# Altium PCB graphics_tester.PcbDoc
Units mm, origin at the board's own origin, x right, y up, seen from the top; angles counter-clockwise.
Board outline 99 x 99 mm, 2 copper layers (Top Layer, Bottom Layer); 2 components, 0 nets, 8 pads, 1 vias.
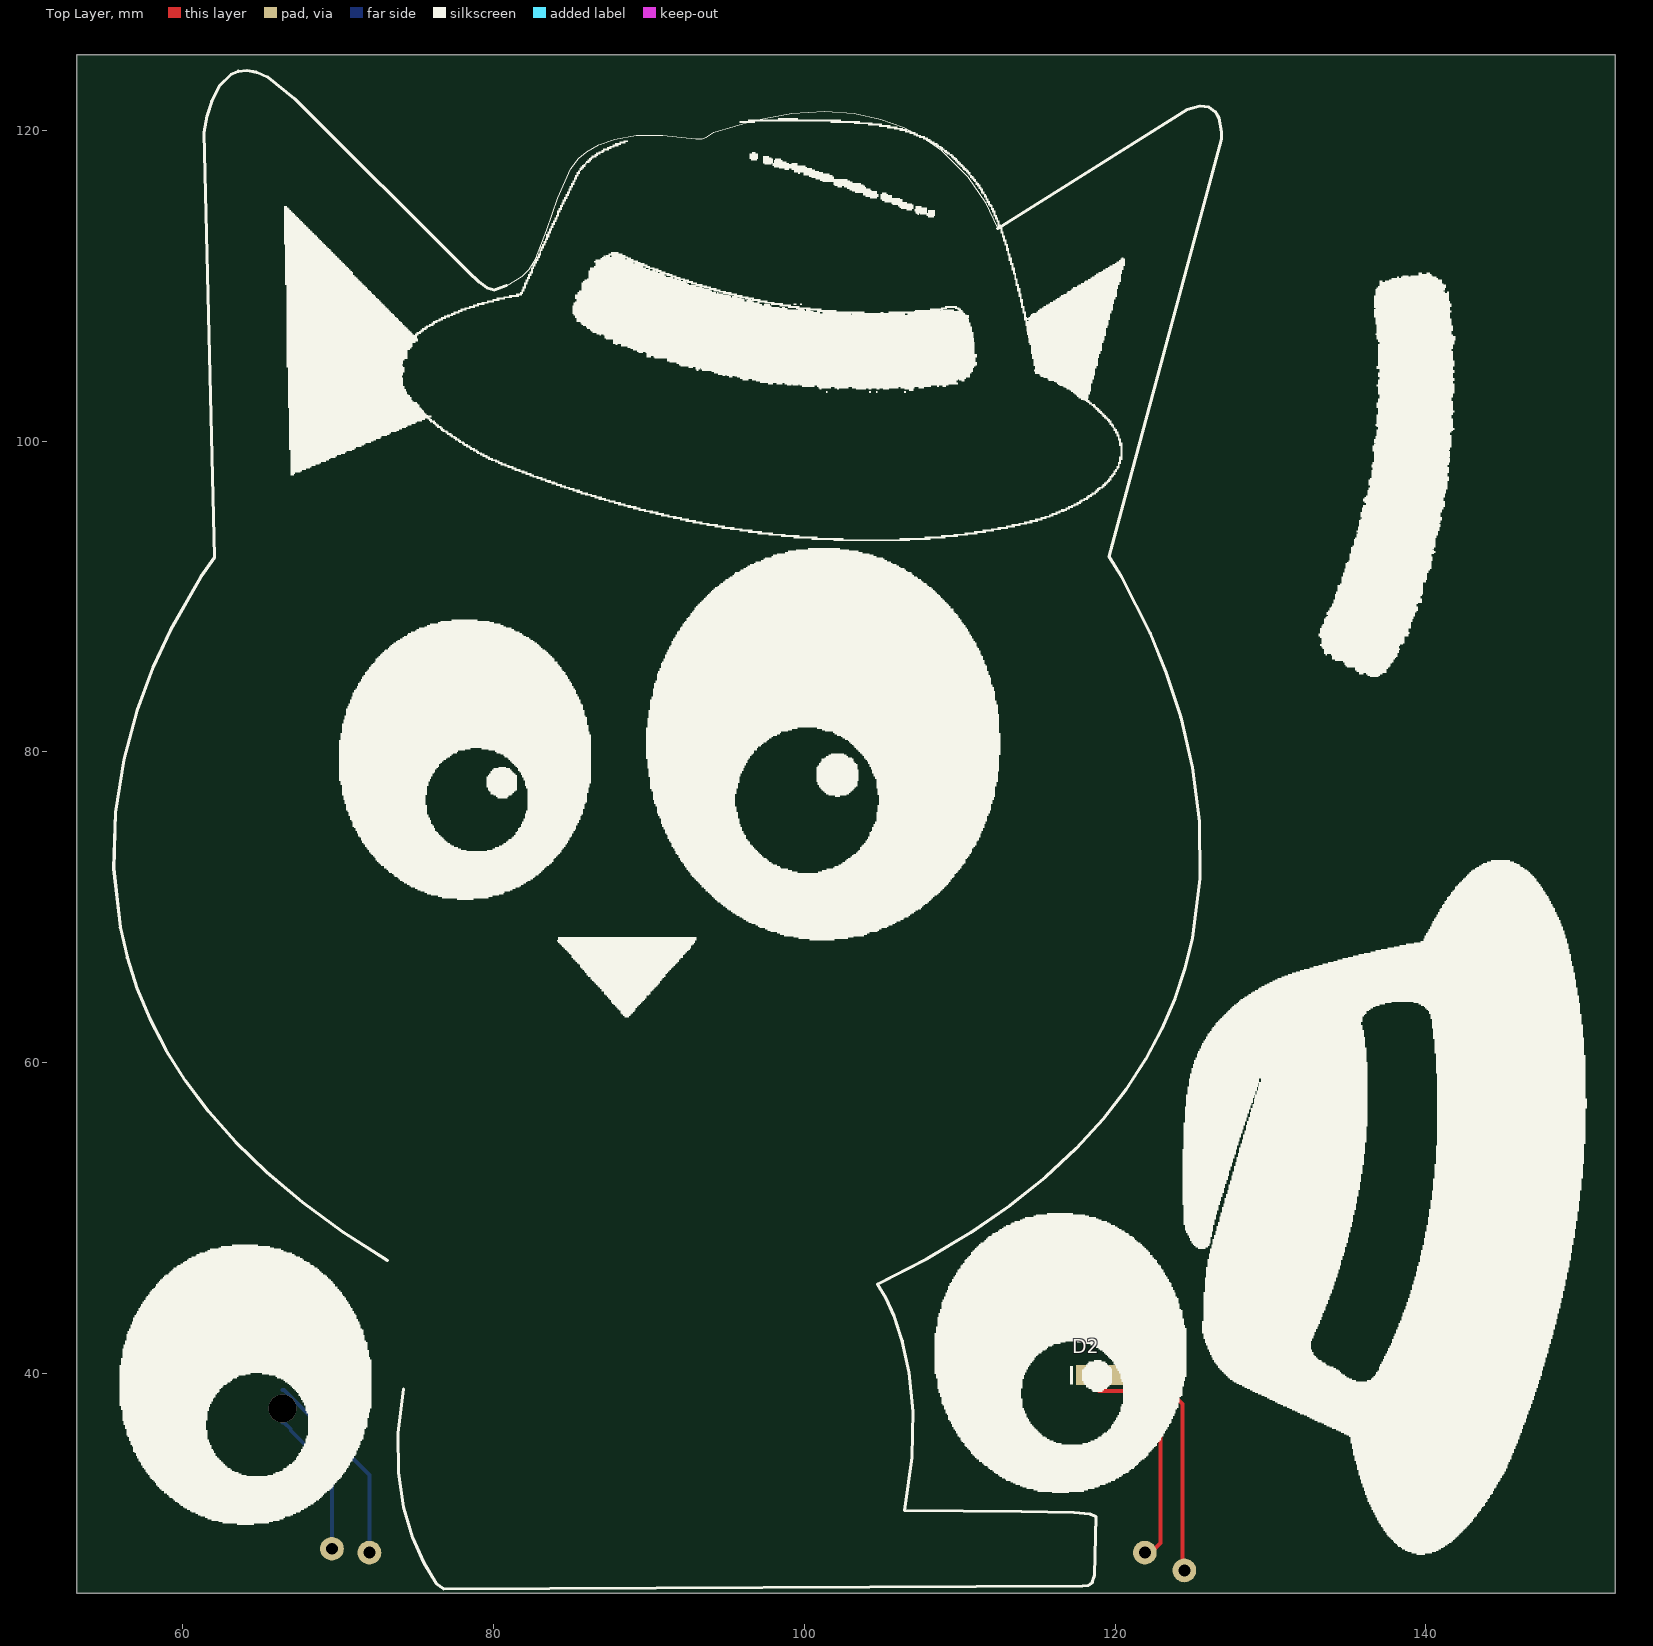
[diagram p0: Top Layer view]
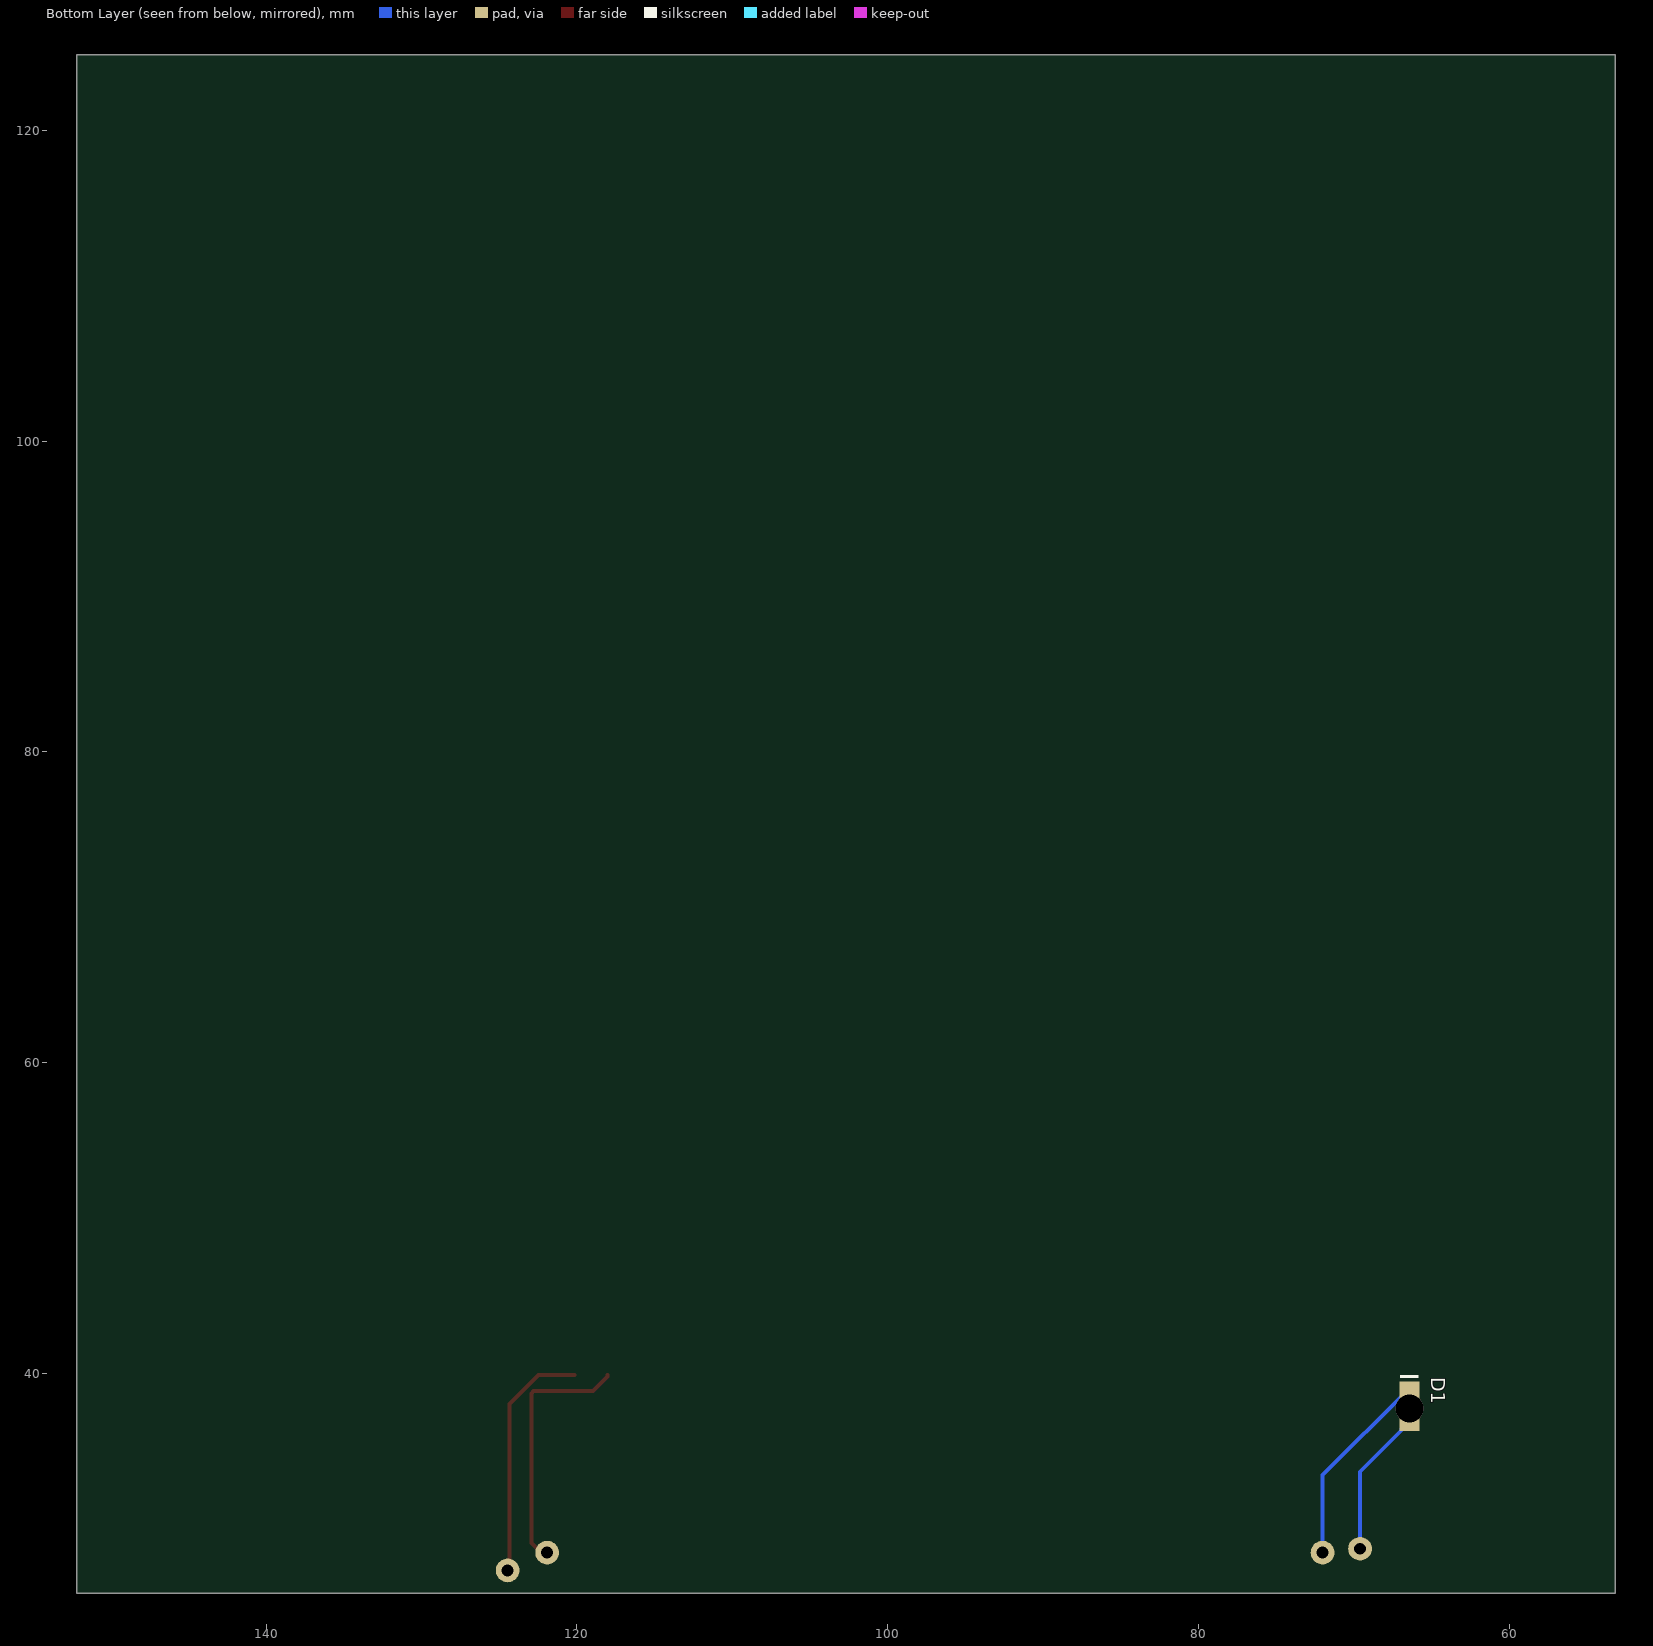
[diagram p1: Bottom Layer view, seen from below]

## Layer stack, top to bottom
Top Solder: solder mask 0.0102, Solder Resist, Dk 3.5
Top Layer: signal copper 0.0356
Dielectric 1: dielectric 0.32, FR-4, Dk 4.8
Bottom Layer: signal copper 0.0356
Bottom Solder: solder mask 0.0102, Solder Resist, Dk 3.5

## Board outline
53.182,25.849 53.182,124.849 152.182,124.849 152.182,25.849

## Design rules (kind name [scope] priority, off if disabled: settings)
Clearance [All] p1: gap=0.254 ignorepadtopadclearanceinfootprint=FALSE
PolygonConnect [All] p1: connectstyle=Relief reliefconductorwidth=0.254 reliefentries=4 polygonreliefangle="90 Angle" airgapwidth=0.254
RoutingVias [All] p1: holewidth=0.711 width=1.27 viastyle="Through Hole" minholewidth=0.711 minwidth=1.27 maxholewidth=0.711 maxwidth=1.27
SolderMaskExpansion [All] p1: expansion=0.102 istentingtop=FALSE
Width [All] p1: maxlimit=0.254 minlimit=0.254 preferedwidth=0.254
30 further rules are at their usual default settings.

## Components (designator, comment, footprint, x,y, rotation, side; value= is the part's Value field where it differs from the comment)
D1 "150080GS75000" WL-SMCW_0805_150080xx75000 66.421,37.88 r270 bottom
D2 "150080GS75000" WL-SMCW_0805_150080xx75000 119.092,39.878 r0 top (schematic designator D1)

## Footprints (in the part's own frame and the unit in brackets; to place one, negate y for a bottom-side part, rotate by r counter-clockwise, add the part's x,y. Pads: shape width x height; smd on the part's side, far side on the other; paste and mask are expansions set on the pad)
WL-SMCW_0805_150080xx75000 [mm] "SMD Mono-color Chip LED, body 2.0x1.25mm"
  rect 1.1x1.3 smd: 1(-1.05,0) 2(1.05,0)
  silkscreen extent -2,-0.6 -1.8,0.6, body extent -1,-0.63 1,0.62, height 0.7

## Part data
D1 D2: library part CMP-1426-00007-2, Case Code (Imperial)=0805, Case Code (Metric)=2012, Color=Green, Forward Current=100mA, Forward Voltage=3.2V, Max Junction Temperature (Tj)=95°C, Max Operating Temperature=85°C, Max Reverse Voltage (DC)=5V, Min Operating Temperature=-40°C, Power Dissipation=105mW, Test Current=20mA, Case/Package=0805, Dominant Wavelength=525nm, Height=700µm, Length=2mm, Lens Style="Clear, Rectangular", Luminous Intensity=450mcd, Mount="Surface Mount", NexarPartId=29717780, Packaging="Tape and Reel", Peak Wavelength=515nm, REACH SVHC=Unknown, Reverse Voltage=5V, RoHS=Compliant, Viewing Angle=140°, Wavelength=520nm, Width=1.25mm

## Free pads (board coordinates)
  round 1.524 hole 0.762: 5(69.596,28.702) 6(72.009,28.448) 7(121.92,28.448) 8(124.46,27.305)

## Via types
v1: diameter 1.8, hole 1.8, Top Layer to Bottom Layer, 1 vias

## Nets (pads, with @x,y where several pads share a name; then routed paths per layer and width w, separated by ;. In a path a pad name is that pad's centre, name@x,y a point inside that pad or via, vN(x,y) a via of type N, cw(c..) or ccw(c..) an arc to the next point about the centre after c; other vN are vias at no path point)
pads on no net: D1.1 D1.2 D2.1 D2.2
copper on no net: | length 53.9
  Top Layer w0.254: 118.042,39.878 118.042,39.778 118.973,38.847 122.787,38.847 122.936,38.698 122.936,29.083 122.301,28.448 ; 120.142,39.878 122.475,39.878 124.333,38.02 124.333,27.432
  Bottom Layer w0.254: v1@66.421,36.83 66.521,36.83 66.944,36.407 66.944,36.307 69.596,33.655 69.596,28.702 ; 66.421,38.93 66.521,38.93 72.009,33.442 72.009,28.448
  other v1: 66.421,37.719

## Silkscreen, mask and mechanical layers (free items; w line width, h text height)
Top Overlay:
  drawing of 158 lines, arcs and shapes, not listed
Top Solder:
  drawing of 3 lines, arcs and shapes, not listed
Bottom Solder:
  drawing of 44 lines, arcs and shapes, not listed
Mechanical 1:
  the board outline again, w0.254
Mechanical 2:
  lines w0.254: -69.239,-151.038 30.761,-151.038 30.761,-0.127 -69.239,-0.127 -69.239,-151.038 ; -64.475,-158.265 35.525,-158.265 35.525,-0.127 -64.475,-0.127 -64.475,-158.265